# Altium PCB Main.PcbDoc
Units mm, origin at the board's own origin, x right, y up, seen from the top; angles counter-clockwise.
Board outline 47.24 x 25.27 mm, 2 copper layers (Top Layer, Bottom Layer); 11 components, 25 nets, 101 pads, 32 vias.
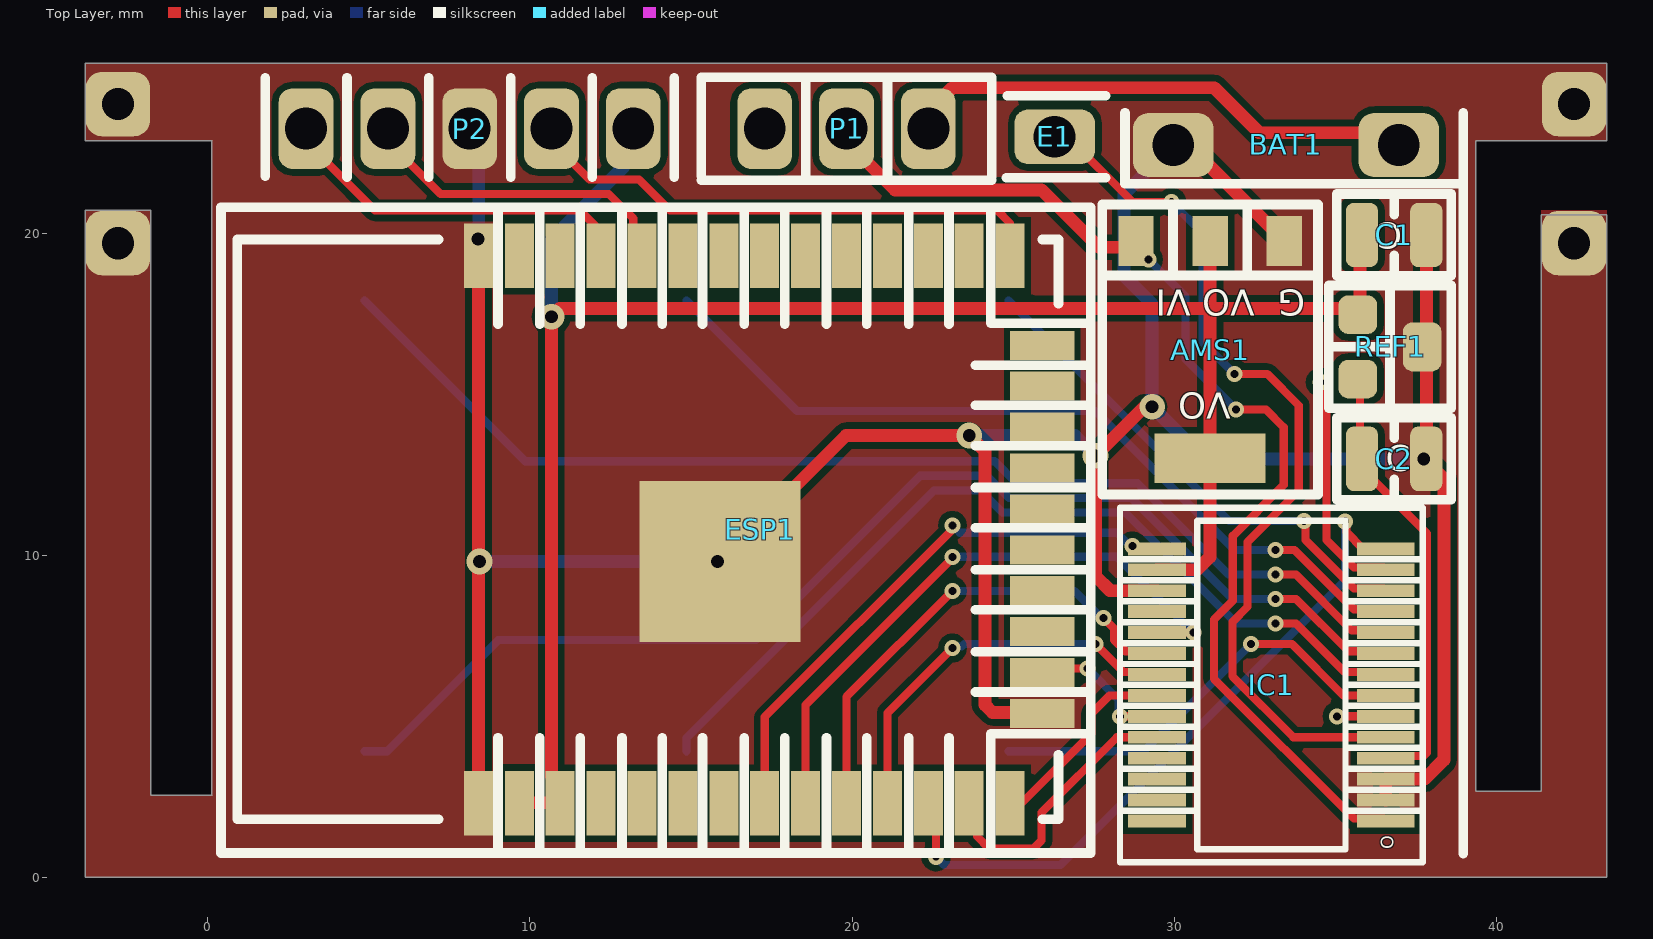
[diagram p0: Top Layer view]
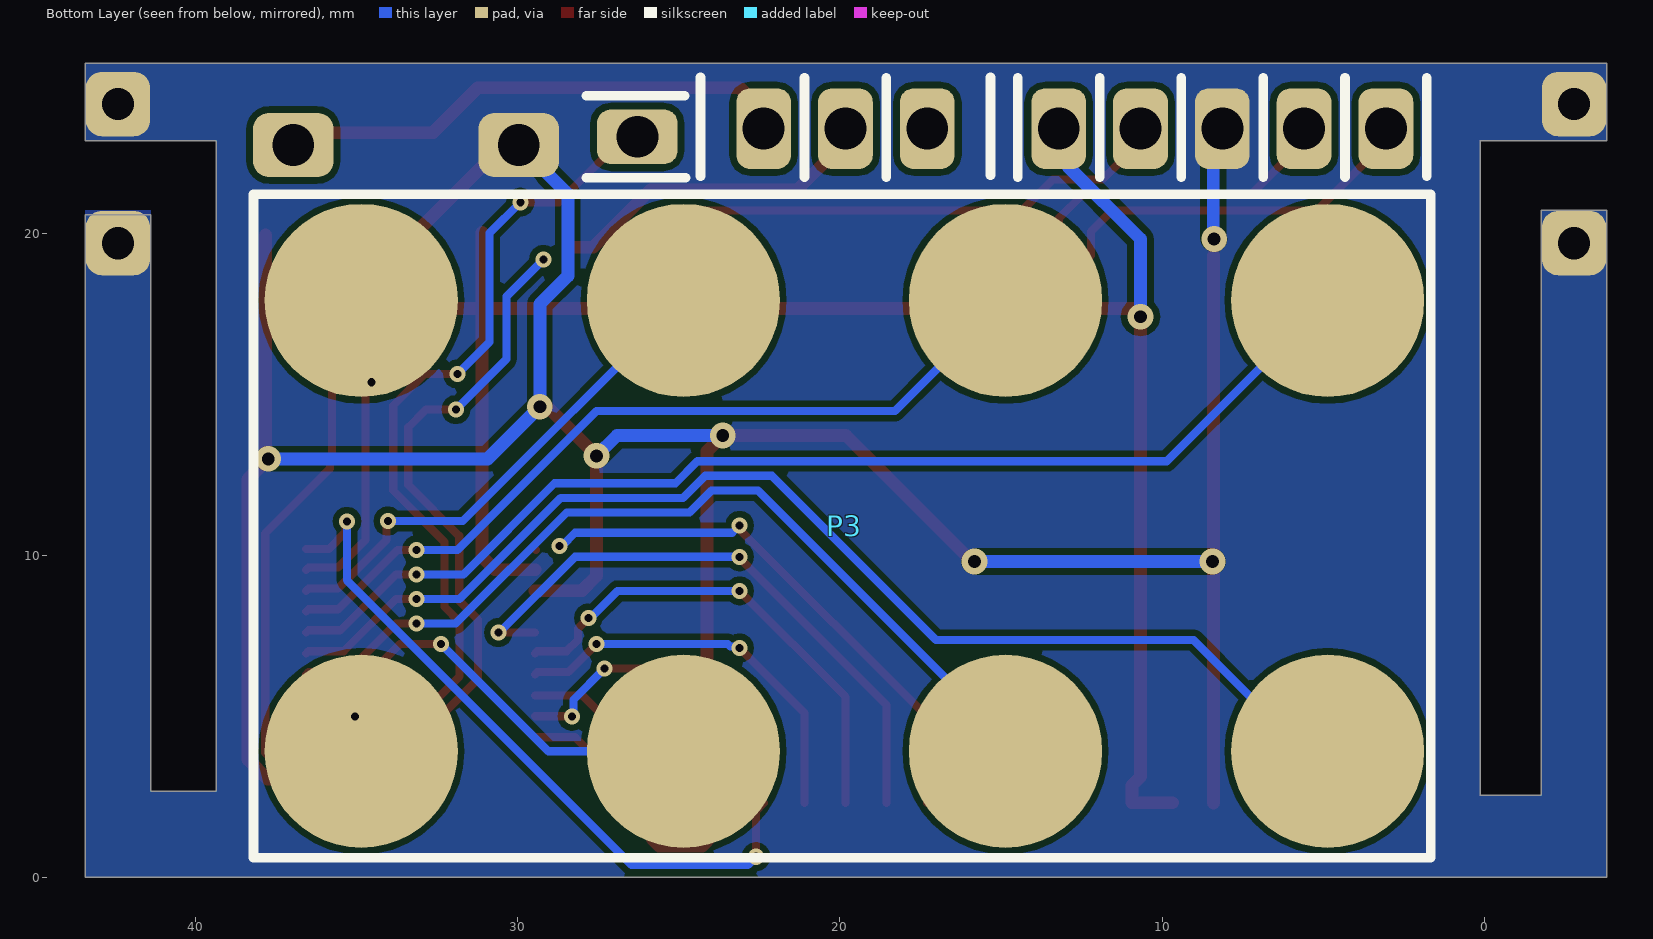
[diagram p1: Bottom Layer view, seen from below]

## Layer stack, top to bottom
Top Solder: solder mask 0.0102, Solder Resist, Dk 3.5
Top Layer: signal copper 0.0356
Dielectric 1: dielectric 0.32, FR-4, Dk 4.8
Bottom Layer: signal copper 0.0356
Bottom Solder: solder mask 0.0102, Solder Resist, Dk 3.5

## Board outline
-1.778,2.54 -1.778,20.701 -3.81,20.701 -3.81,0 43.434,0 43.434,20.574 41.402,20.574 41.402,2.667 39.37,2.667 39.37,22.86 43.434,22.86 43.434,25.273 -3.81,25.273 -3.81,22.86 0.127,22.86 0.127,2.54

## Design rules (kind name [scope] priority, off if disabled: settings)
Clearance [All] p1: gap=0.2 ignorepadtopadclearanceinfootprint=FALSE
ComponentClearance [All] p1: gap=0 collisioncheckmode=3 verticalgap=0 showdistances=FALSE
PolygonConnect [All] p1: connectstyle=Direct reliefconductorwidth=0.254 reliefentries=4 polygonreliefangle="90 Angle" airgapwidth=0.254
RoutingVias [All] p1: holewidth=0.6 width=0.3 viastyle="Through Hole" minholewidth=0.2 minwidth=0.4 maxholewidth=3 maxwidth=3
SolderMaskExpansion [All] p1: expansion=0.102
Width [All] p1: maxlimit=1 minlimit=0.254 preferedwidth=0.254
29 further rules are at their usual default settings.

## Components (designator, comment, footprint, x,y, rotation, side; value= is the part's Value field where it differs from the comment)
AMS1 "AMS1117" AMS1117 31.115,16.383 r180 top locked
BAT1 "BAT" CHARGER 36.972,22.733 r0 top locked
C1 "C" C0805 36.83,19.94 r180 top locked
C2 "C" C0805 36.83,12.989 r0 top locked
E1 "Antenna" 1P 26.289,22.987 r270 top locked
ESP1 "ESP32-WROOM-32D" ESP32WROOM32D 13.908,10.449 r90 top locked
IC1 "ADS1256IDBR" ADS1256IDBR 33.02,5.969 r180 top locked
P1 "Header 3" 3P_SWITCH 19.828,23.241 r0 top locked
P2 "Header 5" 5P 9.398,23.368 r0 top locked
P3 "Header 4X2A" ELECTRODE 19.859,10.907 r0 bottom locked
REF1 "REF3025" REF3025_SOT23 36.703,16.465 r270 top locked

## Footprints (in the part's own frame and the unit in brackets; to place one, negate y for a bottom-side part, rotate by r counter-clockwise, add the part's x,y. Pads: shape width x height; smd on the part's side, far side on the other; paste and mask are expansions set on the pad)
1P [mm]
  rrect50% 1.7x2.5 hole 1.3: 1(0,0)
  silkscreen extent -1.27,-1.5 1.27,1.58
3P_SWITCH [mm]
  rrect50% 1.7x2.5 hole 1.3: 1(-2.54,0) 2(0,0) 3(2.54,0)
  silkscreen extent -4.51,-1.6 4.51,1.6
5P [mm]
  rrect50% 1.7x2.5 hole 1.3: 1(-6.35,-0.127) 2(-3.81,-0.127) 3(-1.27,-0.127) 4(1.27,-0.127) 5(3.81,-0.127)
  silkscreen extent -7.62,-1.63 5.08,1.45
ADS1256IDBR [mm]
  rect 1.8x0.4 smd: 1(-3.55,4.225) 2(-3.55,3.575) 3(-3.55,2.925) 4(-3.55,2.275) 5(-3.55,1.625) 6(-3.55,0.975) 7(-3.55,0.325) 8(-3.55,-0.325) 9(-3.55,-0.975) 10(-3.55,-1.625) 11(-3.55,-2.275) 12(-3.55,-2.925) 13(-3.55,-3.575) 14(-3.55,-4.225) 15(3.55,-4.225) 16(3.55,-3.575) 17(3.55,-2.925) 18(3.55,-2.275) 19(3.55,-1.625) 20(3.55,-0.975) 21(3.55,-0.325) 22(3.55,0.325) 23(3.55,0.975) 24(3.55,1.625) 25(3.55,2.275) 26(3.55,2.925) 27(3.55,3.575) 28(3.55,4.225)
  silkscreen extent -4.7,-5.5 4.7,5.5, body extent -3.9,-5.1 3.9,5.1, height 2
AMS1117 [mm]
  rect 1.1x1.55 smd: 1(-2.3,-3.375) 2(0,-3.375) 3(2.3,-3.375)
  rect 3.45x1.55 smd: 4(0,3.375)
  silkscreen extent -3.35,-4.5 3.35,4.5
C0805 [mm]
  rrect50% 1x2 smd: 1(-1,0) 2(1,0)
  silkscreen extent -1.78,-1.27 1.78,1.27
CHARGER [mm]
  rrect50% 2.5x2 hole 1.3: GND(-7,0) VOUT(0,0)
  silkscreen extent -8.5,-22 2,1
ELECTRODE [mm]
  round 6 smd: 1(-15,-7) 2(-5,-7) 3(5,-7) 4(15,-7) 5(15,7) 6(5,7) 7(-5,7) 8(-15,7)
  silkscreen extent -18.2,-10.3 18.35,10.3
ESP32WROOM32D [mm]
  rect 2x0.9 smd: 1(-8.15,5.51) 2(-8.15,4.24) 3(-8.15,2.97) 4(-8.15,1.7) 5(-8.15,0.43) 6(-8.15,-0.84) 7(-8.15,-2.11) 8(-8.15,-3.38) 9(-8.15,-4.65) 10(-8.15,-5.92) 11(-8.15,-7.19) 12(-8.15,-8.46) 13(-8.15,-9.73) 14(-8.15,-11) 25(8.85,-11) 26(8.85,-9.73) 27(8.85,-8.46) 28(8.85,-7.19) 29(8.85,-5.92) 30(8.85,-4.65) 31(8.85,-3.38) 32(8.85,-2.11) 33(8.85,-0.84) 34(8.85,0.43) 35(8.85,1.7) 36(8.85,2.97) 37(8.85,4.24) 38(8.85,5.51)
  rect 0.9x2 smd: 15(-5.365,-12) 16(-4.095,-12) 17(-2.825,-12) 18(-1.555,-12) 19(-0.285,-12) 20(0.985,-12) 21(2.255,-12) 22(3.525,-12) 23(4.795,-12) 24(6.065,-12)
  rect 5x5 smd: 39(-0.65,-1.99)
  silkscreen extent -9.7,-13.5 10.35,13.5, body extent -8.65,-12.5 9.35,13, height 3.2
REF3025_SOT23 [mm]
  rrect50% 1.524x1.2 smd: GND(0,1)
  rrect50% 1.2x1.2 smd: IN(-1,-1) OUT(1,-1)
  silkscreen extent -1.91,-1.91 1.9,1.91

## Part data
E1: "Generic Antenna", LatestRevisionDate=17-Jul-2002, LatestRevisionNote="Re-released for DXP Platform.", PackageReference=PIN1, Published=24-Mar-1999, Publisher="Altium Limited"
IC1: "Integrated Circuit", Manufacturer_Name="Texas Instruments", Mouser Part Number=595-ADS1256IDBR, Datasheet Link=http://www.ti.com/lit/gpn/ads1256, Height=2mm, Manufacturer_Part_Number=ADS1256IDBR, Mouser Price/Stock=https://www.mouser.com/Search/Refine.aspx?Keyword=595-ADS1256IDBR
P1: "Header, 3-Pin", LatestRevisionDate=17-Jul-2002, LatestRevisionNote="Re-released for DXP Platform.", Publisher="Altium Limited"
P2: "Header, 5-Pin", LatestRevisionDate=17-Jul-2002, LatestRevisionNote="Re-released for DXP Platform.", Publisher="Altium Limited"
P3: "Header, 4-Pin, Dual row", LatestRevisionDate=17-Jul-2002, LatestRevisionNote="Re-released for DXP Platform.", Publisher="Altium Limited"
AMS1: ComponentLink1Description="Manufacturer Link", ComponentLink1URL=http://www.ti.com/, ComponentLink2Description=Datasheet, ComponentLink2URL=http://www-s.ti.com/sc/ds/REG1117.pdf, DatasheetVersion=Sep-1997, LatestRevisionDate=17-Jul-2002, LatestRevisionNote="Re-released for DXP Platform.", PackageDescription="SOT-223/SC-73; 4 Leads; Body 6.7 x 7.3 mm, inc. leads (LxW max)", PackageReference=ZZ311, PackageVersion=revC, Published=8-Jun-2000, Publisher="Altium Limited"
BAT1: LatestRevisionDate=17-Jul-2002, LatestRevisionNote="Re-released for DXP Platform.", PackageDescription="Battery; 2 Leads", PackageReference=BAT-2, Published=24-Mar-1999, Publisher="Altium Limited"
C1 C2: LatestRevisionDate=17-Jul-2002, LatestRevisionNote="Re-released for DXP Platform.", PackageDescription="Radial Cap, Thru-Hole; 2 Leads; 0.3 in Pin Spacing", PackageReference=RAD-0.3, Published=8-Jun-2000, Publisher="Altium Limited"
ESP1: LatestRevisionDate=17-Jul-2002, LatestRevisionNote="Re-released for DXP Platform.", Publisher="Altium Limited"

## Free pads (board coordinates)
  rrect50% 2x2 hole 1: 4(-2.794,24.003) 4(42.418,24.003) 5(-2.794,19.685) 5(42.418,19.685)

## Via types
v1: diameter 0.5, hole 0.25, Top Layer to Bottom Layer, 24 vias
v2: diameter 0.8, hole 0.4, Top Layer to Bottom Layer, 8 vias

## Nets (pads, with @x,y where several pads share a name; then routed paths per layer and width w, separated by ;. In a path a pad name is that pad's centre, name@x,y a point inside that pad or via, vN(x,y) a via of type N, cw(c..) or ccw(c..) an arc to the next point about the centre after c; other vN are vias at no path point)
2V5: C2.1 IC1.4 REF1.OUT | length 13.8
  Top Layer w0.254: REF1.OUT 35.766,15.401 35.766,13.053 C2.1 35.83,12.684 37.846,10.668 37.846,3.862 37.751,3.767 36.643,3.767 IC1.4
3V3: AMS1.2 AMS1.4 C1.2 ESP1.2 ESP1.3 IC1.16 P2.5 REF1.IN | length 62.7
  Top Layer w0.4: ESP1.2@9.668,2.312 10.938,2.312 10.938,2.849 10.668,3.119 v2(10.668,17.399) 10.922,17.653 31.115,17.653 ; IC1.16 30.712,9.544 31.115,9.947 AMS1.4 ; AMS1.4@31.115,13.262 31.115,17.653 ; 31.115,17.78 AMS1.2 AMS1.2@31.115,20.012 ; C1.2@35.758,20.012 C1.2 35.766,19.876 35.766,17.528 REF1.IN 35.515,17.653 31.115,17.653
  Bottom Layer w0.4: v2(10.668,17.399) 10.668,19.812 12.91,22.054 12.91,22.943 P2.5
+5: AMS1.3 IC1.1 P1.2 | length 33.6
  Top Layer w0.254: v1(31.925,14.518) 32.853,14.518 33.401,13.97 33.401,12.178 31.822,10.599 31.822,8.585 31.242,8.005 31.242,6.16 35.585,1.817 36.497,1.817 IC1.1
  Top Layer w0.4: P1.2 19.828,22.841 21.333,21.336 25.886,21.336 27.664,19.558 AMS1.3@28.321,19.558
  Bottom Layer w0.254: v1(29.21,19.177) 30.353,18.034 30.353,16.09 v1(31.925,14.518)
GND: AMS1.1 BAT1.GND C1.1 C2.2 ESP1.1 ESP1.15 ESP1.38 ESP1.39 IC1.2 IC1.3 IC1.17 P2.3 pad.4 pad.5 REF1.GND | length 102.5
  Top Layer w0.4: ESP1.1 ESP1.38 ; v2(15.819,9.799) ESP1.39 19.815,13.716 v2(23.638,13.716) 24.13,13.224 24.13,5.35 24.364,5.116 25.876,5.116 ESP1.15 ; v2@29.397,14.605 v2(29.318,14.605) 29.083,14.605 v2(27.559,13.081) 27.559,9.348 28.013,8.894 IC1.17 ; BAT1.GND 30.03,22.675 30.498,22.675 AMS1.1 ; IC1.2 IC1.3 37.773,3.044 38.373,3.644 38.373,12.367 v2(37.751,12.989) ; C2.2 C1.1
  Bottom Layer w0.4: P2.3 8.411,22.958 8.411,19.841 v2(8.382,19.812) ; v2(8.43,9.799) v2(15.819,9.799) ; v2(23.638,13.716) 26.924,13.716 v2(27.559,13.081) ; BAT1.GND 29.924,22.733 29.079,21.888 29.079,21.84 28.448,21.209 28.448,18.669 29.318,17.799 v2(29.318,14.605) 30.933,12.989 v2(37.751,12.989)
NetBAT1_VOUT: BAT1.VOUT P1.3 | length 16.2
  Top Layer w0.4: P1.3 22.368,23.765 23.114,24.511 31.242,24.511 32.639,23.114 36.341,23.114 36.722,22.733 BAT1.VOUT
NetE1_1: E1.1 IC1.5 | length 27.8
  Top Layer w0.254: E1.1 26.689,22.987 28.721,20.955 v1(29.924,20.955) ; v1(31.877,15.621) 32.893,15.621 33.869,14.645 33.869,12.004 32.276,10.411 32.276,8.397 31.808,7.929 31.808,6.236 33.7,4.344 IC1.5
  Bottom Layer w0.254: v1(29.924,20.955) 30.877,20.002 30.877,16.621 v1(31.877,15.621)
NetESP1_8: ESP1.8 IC1.15 | length 16.9
  Top Layer w0.254: ESP1.8 17.288,4.969 23.114,10.795 v1(23.114,10.922) ; IC1.15@29.436,10.16 IC1.15
  Bottom Layer w0.254: v1(23.114,10.922) 23.343,10.693 28.229,10.693 28.635,10.287 v1(28.702,10.287)
NetESP1_9: ESP1.9 IC1.19 | length 19.1
  Top Layer w0.254: ESP1.9 18.558,5.35 23.114,9.906 v1(23.114,9.947) ; IC1.19 v1(30.607,7.594)
  Bottom Layer w0.254: v1(23.114,9.947) 28.226,9.947 30.579,7.594 v1(30.607,7.594)
NetESP1_10: ESP1.10 IC1.20 | length 15.3
  Top Layer w0.254: ESP1.10 19.828,5.604 v1(23.114,8.89) ; v1(27.813,8.046) 28.136,7.723 28.136,7.366 28.485,7.017 29.397,7.017 IC1.20
  Bottom Layer w0.254: v1(23.114,8.89) 26.902,8.89 27.746,8.046 v1(27.813,8.046)
NetESP1_11: ESP1.11 IC1.21 | length 12.4
  Top Layer w0.254: ESP1.11 21.098,5.096 v1(23.114,7.112) ; v1(27.559,7.239) 28.431,6.367 29.397,6.367 IC1.21
  Bottom Layer w0.254: v1(23.114,7.112) 23.161,7.159 23.406,7.159 23.486,7.239 v1(27.559,7.239)
NetESP1_12: ESP1.12 IC1.14 | length 21.8
  Top Layer w0.254: ESP1.12 22.606,2.061 v1(22.606,0.635) ; v1(35.306,11.049) 35.353,11.002 35.353,10.711 35.87,10.194 IC1.14
  Bottom Layer w0.254: v1(22.606,0.635) 22.86,0.381 26.47,0.381 35.306,9.217 v1(35.306,11.049)
NetESP1_13: ESP1.13 IC1.24 | length 8.8
  Top Layer w0.254: ESP1.13 23.876,2.061 23.876,1.27 24.257,0.889 25.632,0.889 25.886,1.143 25.886,2.01 28.22,4.344 IC1.24
NetESP1_14: ESP1.14 IC1.22 | length 6.3
  Top Layer w0.254: ESP1.14 25.268,2.299 27.432,4.463 27.432,5.08 27.996,5.644 IC1.22
NetESP1_16: ESP1.16 IC1.23 | length 4.5
  Top Layer w0.254: ESP1.16 26.031,6.477 v1(27.305,6.477) ; v1(28.321,4.994) IC1.23
  Bottom Layer w0.254: v1(27.305,6.477) 28.274,5.508 28.274,5.041 v1(28.321,4.994)
NetESP1_25: ESP1.25 P2.4 | length 16.7
  Top Layer w0.254: P2.4 10.668,22.841 11.845,21.664 13.388,21.664 14.351,20.701 24.511,20.701 24.908,20.304 ESP1.25
NetESP1_34: ESP1.34 P2.2 | length 10.3
  Top Layer w0.254: P2.2 5.588,22.841 7.22,21.209 12.446,21.209 13.208,20.447 13.208,19.569 ESP1.34
NetESP1_35: ESP1.35 P2.1 | length 11.5
  Top Layer w0.254: P2.1 3.048,22.841 5.188,20.701 11.557,20.701 12.208,20.05 ESP1.35
NetIC1_6: IC1.6 P3.5 | length 1.5
  Top Layer w0.254: v1(35.052,4.994) IC1.6
NetIC1_7: IC1.7 P3.6 | length 13.8
  Top Layer w0.254: v1(32.385,7.239) 33.655,7.239 35.25,5.644 IC1.7
  Bottom Layer w0.254: P3.6 29.053,3.907 v1(32.385,7.239)
NetIC1_8: IC1.8 P3.7 | length 27.7
  Top Layer w0.254: v1(33.147,7.874) 33.782,7.874 35.289,6.367 36.497,6.367 IC1.8
  Bottom Layer w0.254: P3.7 14.859,4.324 22.542,12.007 23.988,12.007 24.673,11.322 28.483,11.322 31.931,7.874 v1(33.147,7.874)
NetIC1_9: IC1.9 P3.8 | length 37.5
  Top Layer w0.254: v1(33.147,8.636) 33.786,8.636 35.405,7.017 36.497,7.017 IC1.9
  Bottom Layer w0.254: P3.8 5.558,3.907 9.017,7.366 17.018,7.366 22.113,12.461 24.184,12.461 24.869,11.776 28.671,11.776 31.811,8.636 v1(33.147,8.636)
NetIC1_10: IC1.10 P3.1 | length 36
  Top Layer w0.254: v1(33.147,9.398) 33.782,9.398 35.513,7.667 36.497,7.667 IC1.10
  Bottom Layer w0.254: P3.1 9.851,12.915 24.423,12.915 25.108,12.23 28.859,12.23 31.691,9.398 v1(33.147,9.398)
NetIC1_11: IC1.11 P3.2 | length 25.7
  Top Layer w0.254: v1(33.147,10.16) 33.742,10.16 35.585,8.317 36.497,8.317 IC1.11
  Bottom Layer w0.254: P3.2 18.288,14.478 27.559,14.478 31.877,10.16 v1(33.147,10.16)
NetIC1_12: IC1.12 P3.3 | length 15.8
  Top Layer w0.254: v1(34.036,11.055) 34.083,11.008 34.083,10.468 35.585,8.967 36.497,8.967 IC1.12
  Bottom Layer w0.254: P3.3 31.711,11.055 v1(34.036,11.055)
NetIC1_13: IC1.13 P3.4 | length 7.2
  Top Layer w0.254: v1(34.544,15.367) 34.729,15.182 34.729,10.473 35.585,9.617 36.497,9.617 IC1.13
pads on no net: ESP1.4 ESP1.5 ESP1.6 ESP1.7 ESP1.17 ESP1.18 ESP1.19 ESP1.20 ESP1.21 ESP1.22 ESP1.23 ESP1.24 ESP1.26 ESP1.27 ESP1.28 ESP1.29 ESP1.30 ESP1.31 ESP1.32 ESP1.33 ESP1.36 ESP1.37 IC1.18 IC1.25 IC1.26 IC1.27 IC1.28 P1.1

## Polygon pours and split planes (outlines as drawn)
GND on Top Layer "Top Layer-GND" (solid, pour order 1): -1.778,2.54 -1.778,20.701 -3.81,20.701 -3.81,0 43.434,0 43.434,20.701 41.402,20.701 41.402,2.667 39.37,2.667 39.37,22.86 43.434,22.86 43.434,25.273 -3.81,25.273 -3.81,22.86 0.127,22.86 0.127,2.54
GND on Bottom Layer "Bottom Layer-GND" (solid, pour order 2): -1.778,2.54 -1.778,20.701 -3.81,20.701 -3.81,0 43.434,0 43.434,20.701 41.402,20.701 41.402,2.667 39.37,2.667 39.37,22.86 43.434,22.86 43.434,25.273 -3.81,25.273 -3.81,22.86 0.127,22.86 0.127,2.54

## Silkscreen, mask and mechanical layers (free items; w line width, h text height)
Mechanical 1:
  lines w0.3: -3.81,0 -3.81,20.701 -1.778,20.701 -1.778,2.54 0.127,2.54 0.127,22.86 -3.81,22.86 -3.81,25.273 41.91,25.273 43.434,25.273 43.434,22.86 39.37,22.86 39.37,2.667 41.402,2.667 41.402,20.701 43.434,20.701 43.434,0 -3.81,0

## Text inside footprints (layer, text, board x,y; h text height)
AMS1: Top Overlay "VO" at 31.765,15.033 h0.8 r180; Top Overlay "G  VO VI" at 34.065,18.233 h0.8 r180
IC1: Top Overlay "O" at 36.82,0.869 h0.4 r90